# EAGLE board rocketnet-daughter-18 (EAGLE 6.5.0)

Size 20 x 6.6 mm. Coordinates in mm from the lower left corner, seen from the top.
Outline: 20,0 20,6.6 1,6.6 0,5.6 0,1 1,0 20,0
Copper layers (1*16): Top 0.035mm / dielectric 1.5mm / Bottom 0.035mm
Design rules "lpkf-s63-epl": minimum track width 10mil, minimum drill 0.35mm, track to track 8mil, track to pad 8mil, pad to pad 8mil, via to via 8mil, smd to smd 8mil, copper to edge 10mil, drill to drill 8mil, minimum pad ring 10mil, minimum via ring 8mil, stop-mask expansion 4mil, vias tented up to drill 0mil, thermal gap 10mil
Holes 2.44 mm at 18.44,3.3 1.57,3.3

## Footprints (pad centres in the part's own frame; a part is rotated, then mirrored left to right if it is on the bottom)
22AWG-WIRE = drill 0.9 pad 1.6: P$1 0,0
HARWIN-M50-31509-NO-HOLES = smd 0.71 x 1.65: 1 -5.08,-1.925; 2 -5.08,1.925; 3 -3.81,-1.925; 4 -3.81,1.925; 5 -2.54,-1.925; 6 -2.54,1.925; 7 -1.27,-1.925; 8 -1.27,1.925; 9 0,-1.925; 10 0,1.925; 11 1.27,-1.925; 12 1.27,1.925; 13 2.54,-1.925; 14 2.54,1.925; 15 3.81,-1.925; 16 3.81,1.925; 17 5.08,-1.925; 18 5.08,1.925 | hole 0.71: 4.445,0; -4.445,0
26AWG-WIRE = drill 0.65: P$1 0,0

## Placement (x,y rotation side)
E$1  [22AWG-WIRE]  7.1,3.6 90 top
E$2  [HARWIN-M50-31509-NO-HOLES]  10.3,3.3 0 bottom
E$4  [22AWG-WIRE]  13.5,3.6 90 top
E$8  [26AWG-WIRE]  11.8,2.8 90 top
E$9  [26AWG-WIRE]  16.3,1.4 90 top
E$10  [26AWG-WIRE]  10.3,3.3 90 top
E$12  [26AWG-WIRE]  4.3,1.4 90 top
E$13  [26AWG-WIRE]  8.8,2.8 90 top

## Library data of the parts
E$1 E$2 E$4 E$8-E$10 E$12 E$13 = rocketnet-connector

## Nets
S$2: E$10.P$1
S$4: E$9.P$1
S$5: E$8.P$1

## Tracks (layer width: path | path; a pad name or v marks a point on that pad's centre or on a via)
(copper drawn outside any net)
  shapes: Bottom area x11, Top area x7

## Text on the board
Document: TOP VIEW (M50 on bottom of board) | V- | RKTRDY | V+ | #2-56 nylock / (5/32" OD) | RX+ | TX- | TX+ | RX-